# Altium PCB SW 12.PcbDoc
Units mil, origin at the board's own origin, x right, y up, seen from the top; angles counter-clockwise.
Board outline 1183 x 1280 mil, 2 copper layers (Top Layer, Bottom Layer); 30 components, 16 nets, 78 pads, 28 vias.
Unrouted connection lines stored in the file: 1.
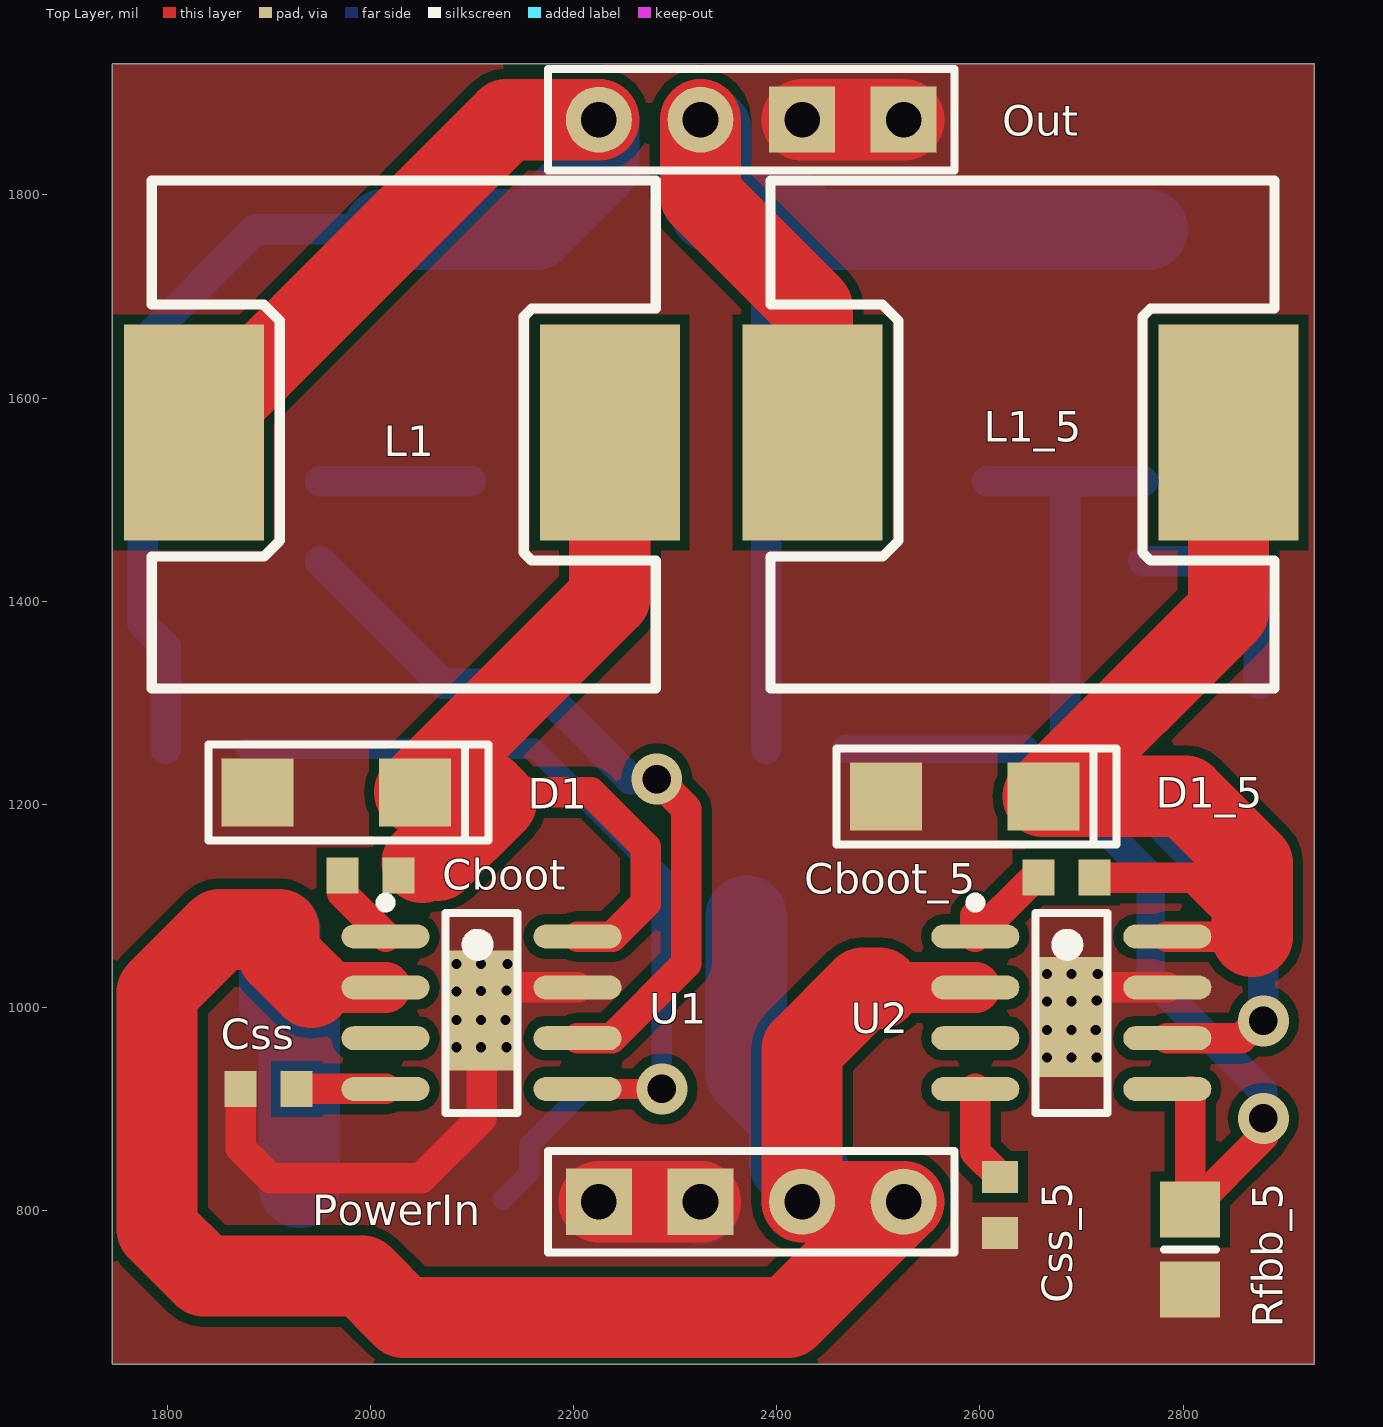
[diagram p0: Top Layer view]
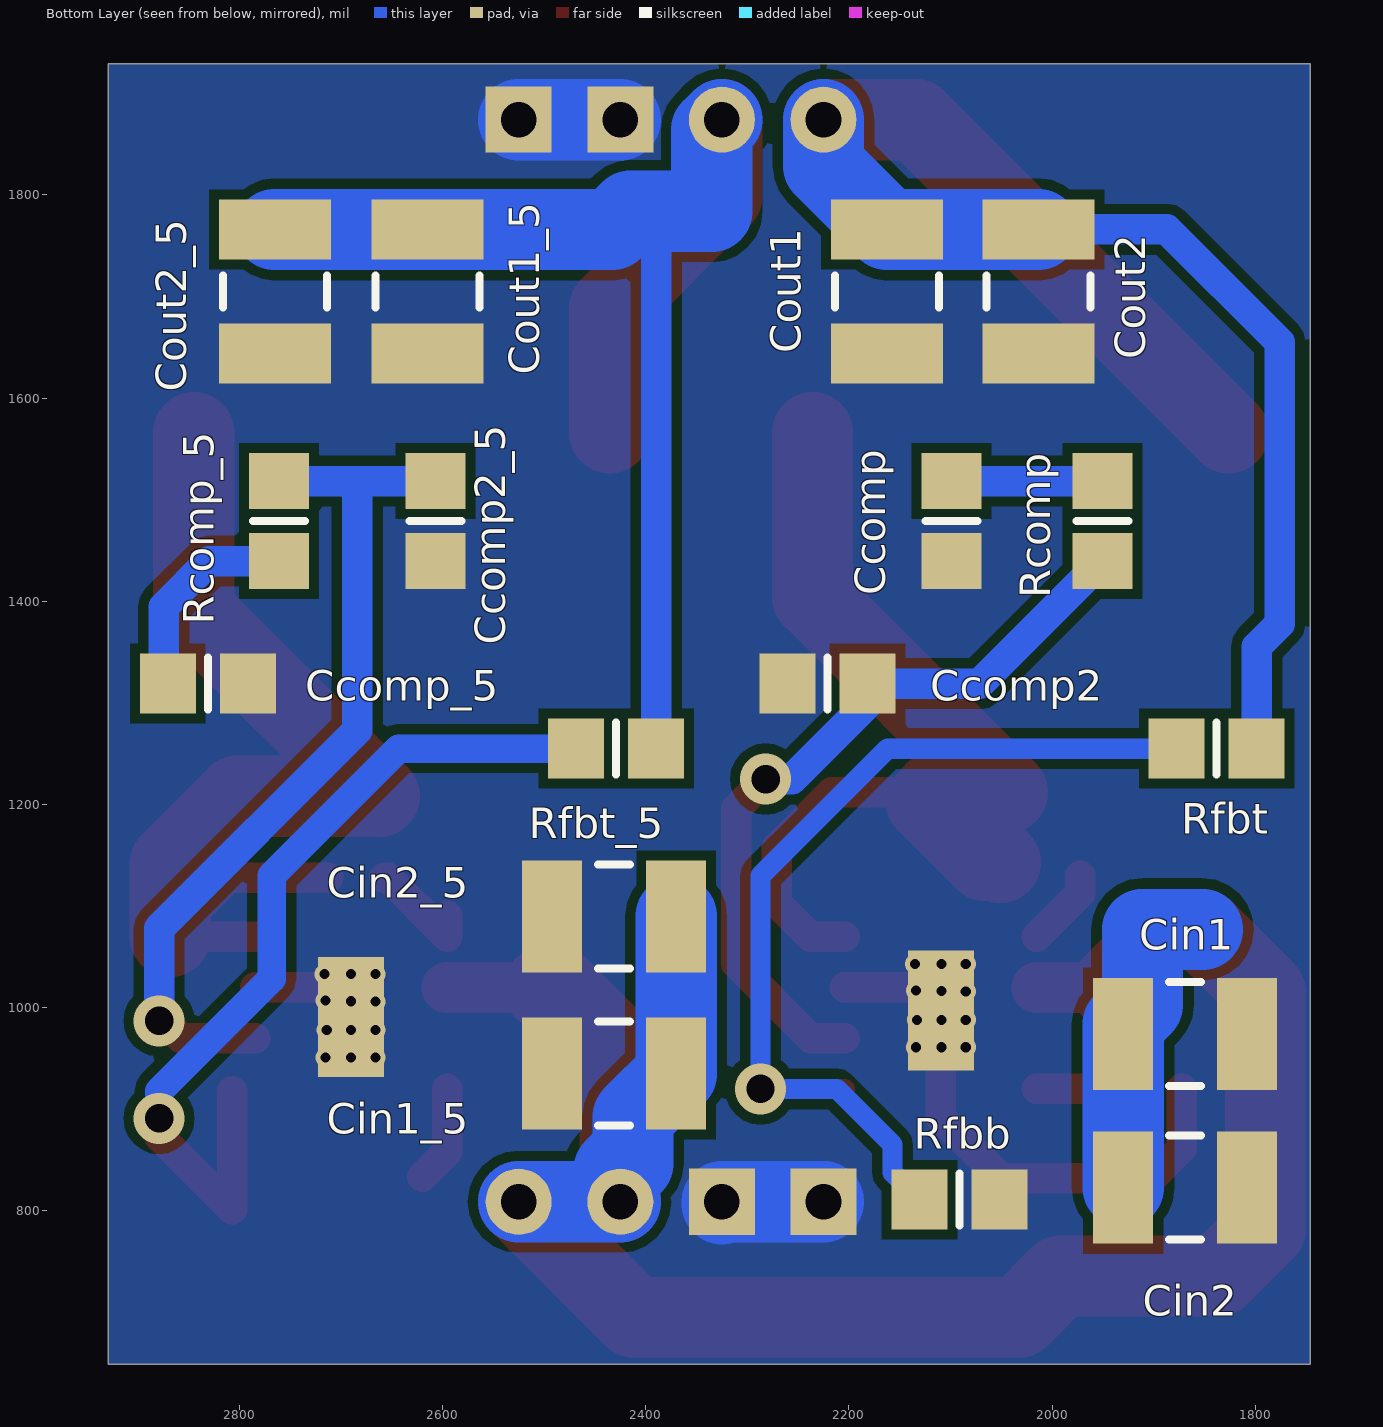
[diagram p1: Bottom Layer view, seen from below]

## Layer stack, top to bottom
Top Solder: solder mask 0.4, Solder Resist, Dk 3.5
Top Layer: signal copper 1.4
Dielectric 1: dielectric 12.6, FR-4, Dk 4.8
Bottom Layer: signal copper 1.4
Bottom Solder: solder mask 0.4, Solder Resist, Dk 3.5

## Board outline
1746,649 2929,649 2929,1929 1746,1929

## Design rules (kind name [scope] priority, off if disabled: settings)
Clearance [All] p1: gap=10
ComponentClearance [All] p1: gap=5 collisioncheckmode=3 verticalgap=5 showdistances=FALSE
PlaneConnect [All] p1: planeconnectstyle=Direct reliefexpansion=20 reliefentries=4 reliefconductorwidth=10 reliefairgap=10
PolygonConnect [All] p1: connectstyle=Direct reliefconductorwidth=10 reliefentries=4 polygonreliefangle="90 Angle" airgapwidth=10
RoomDefinition "Fuente 12V" [InComponentClass('Components Class 1')] p1: confinementstyle=ConfineIn formatcopy=TRUE lockcomponents=FALSE outline 2320,1880 1748.5,1880 1748.5,745 2320,745
RoutingVias [All] p1: holewidth=25 width=50 viastyle="Through Hole" minholewidth=10 minwidth=10 maxholewidth=28 maxwidth=50
SolderMaskExpansion [All] p1: expansion=4
Width [All] p1: maxlimit=80 minlimit=10 preferedwidth=20
28 further rules are at their usual default settings.

## Classes and differential pairs
component class "Components Class 1": Cboot Ccomp Ccomp2 Cin1 Cin2 Cout1 Cout2 Css D1 L1 Rcomp U1
component class SW_S_5: Cboot_5 Ccomp2_5 Ccomp_5 Cin1_5 Cin2_5 Cout1_5 Cout2_5 Css_5 D1_5 L1_5 Rcomp_5 Rfbb_5 Rfbt_5 U2
component class "SW 12": Out PowerIn
component class SW_S_12: Cboot Ccomp Ccomp2 Cin1 Cin2 Cout1 Cout2 Css D1 Iout L1 Rcomp Rfbb Rfbt U1 Vin

## Components (designator, comment, footprint, x,y, rotation, side; value= is the part's Value field where it differs from the comment)
Cboot "C1608X7R1E104K" 1608[0603] 2000,1130 r0 top
Cboot_5 "C1608X7R1E104K" 1608[0603] 2685,1128 r0 top
Ccomp "CC0805KRX7R9BB152" 6-0805_M 2099,1479 r270 bottom
Ccomp2 "CL21C300JBANNNC" 6-0805_M 2221,1319 r0 bottom
Ccomp2_5 "CL21C300JBANNNC" 6-0805_M 2607,1479 r270 bottom
Ccomp_5 "CC0805KRX7R9BB152" 6-0805_M 2831,1319 r180 bottom
Cin1 "GRM32ER71H475KA88L" C1210_M 1869,974 r180 bottom
Cin1_5 "GRM32ER71H475KA88L" C1210_M 2431,935 r0 bottom
Cin2 "GRM32ER71H475KA88L" C1210_M 1869,823 r180 bottom
Cin2_5 "GRM32ER71H475KA88L" C1210_M 2431,1090 r0 bottom
Cout1 "GRM32ER61E226KE15L" C1210_M 2162.5,1705 r270 bottom
Cout1_5 "GRM32ER61E226KE15L" C1210_M 2615,1705 r270 bottom
Cout2 "GRM32ER61E226KE15L" C1210_M 2013.5,1705 r270 bottom
Cout2_5 "GRM32ER61E226KE15L" C1210_M 2765,1705 r270 bottom
Css "GRM188R71E822KA01D" 1608[0603] 1900,920 r180 top
Css_5 "GRM188R71E822KA01D" 1608[0603] 2620,806 r270 top
D1 "B340A-13-F" "SMA Diode Package" 1966.5,1212 r180 top
D1_5 "B340A-13-F" "SMA Diode Package" 2585,1208 r180 top
L1 "SRR1260-150M" SRR1260 2033,1566 r180 top
L1_5 "SRR1260-150M" SRR1260 2642,1566 r180 top
Out "Header 4" HDR1X4 2225,1874 r0 top
PowerIn "Header 4" HDR1X4 2525,809 r180 top
Rcomp "CRCW080538K3FKEA" 6-0805_M 1950.5,1479 r90 bottom
Rcomp_5 "CRCW080538K3FKEA" 6-0805_M 2761,1479 r270 bottom
Rfbb "CRCW0805732RFKEA" 6-0805_M 2091,811 r180 bottom
Rfbb_5 "CRCW0805732RFKEA" 6-0805_M 2807,762 r270 top
Rfbt "CRCW080510K2FKEA" 6-0805_M 1838,1255 r0 bottom
Rfbt_5 "CRCW080510K2FKEA" 6-0805_M 2429,1255 r0 bottom
U1 "TPS54331DDAR" TI-D8_N 2109.5,995 r0 top
U2 "TPS54331DDAR" TI-D8_N 2690,995 r0 top

## Footprints (in the part's own frame and the unit in brackets; to place one, negate y for a bottom-side part, rotate by r counter-clockwise, add the part's x,y. Pads: shape width x height; smd on the part's side, far side on the other; paste and mask are expansions set on the pad)
6-0805_M [mm] "Chip Resistor, Body 2.0x1.2mm, IPC Low Density"
  rect 1.4x1.5 smd: 1(-1,0) 2(1,0)
  silkscreen extent 0,-0.65 0,0.65, body extent -1.07,-0.7 1.07,0.7, height 0.7
1608[0603] [mm] "Chip Capacitor, Body 1.6x0.8mm, IPC High Density"
  rect 0.8x0.9 smd: 1(-0.7,0) 2(0.7,0)
  body extent -0.87,-0.48 0.87,0.48, height 1.3
C1210_M [mm] "Chip Capacitor, Body 3.2x2.5mm, IPC Low Density"
  rect 1.5x2.8 smd: 1(-1.55,0) 2(1.55,0)
  silkscreen extent -0.4,-1.3 0.4,1.3, body extent -1.7,-1.35 1.7,1.35, height 1.5
HDR1X4 [mil] "Connector; Header; 4 Position"
  round 65 hole 35: 1(0,0) 2(100,0)
  rect 65x65 hole 35: 3(200,0) 4(300,0)
  silkscreen extent -50,-50 350,50
"SMA Diode Package" [mm]
  rect 1.8x1.7 smd: 1(-1.965,0) 2(1.965,0)
  silkscreen extent -3.8,-1.2 3.2,1.2, body extent -2.6,-1.2 2.6,1.2, height 2.44
SRR1260 [mm]
  rect 3.5x5.4 smd paste+0: 1(-5.15,0)
  rect 3.5x5.4 smd: 2(5.25,0)
  silkscreen extent -6.3,-6.3 6.3,6.4, body extent -6.3,-6.3 6.3,6.4, height 6.15
TI-D8_N [mm] "SOIC, 8-Leads, Body 4.9x3.9mm, Pitch 1.27mm, IPC Medium Density"
  oval 2.2x0.6 smd: 1(-2.4,1.905) 2(-2.4,0.635) 3(-2.4,-0.635) 4(-2.4,-1.905) 5(2.4,-1.905) 6(2.4,-0.635) 7(2.4,0.635) 8(2.4,1.905)
  silkscreen extent -2.52,-2.5 0.9,2.88, body extent -2,-2.5 2,2.5, height 1.75

## Part data
Ccomp Ccomp_5: "CC0805KRX7R9BB15"
Cin1 Cin1_5 Cin2 Cin2_5: "GRM32ER71H475KA8"
Cout1 Cout1_5 Cout2 Cout2_5: "GRM32ER61E226KE1"
Css Css_5: "GRM188R71E822KA0"
Out PowerIn: "Header, 4-Pin"

## Free pads (board coordinates)
  rect 65x118.11 all layers, no hole: ""(2109.5,997) ""(2690,991)

## Via types
v1: diameter 20, hole 10, Top Layer to Bottom Layer, 24 vias
v2: diameter 50, hole 28, Top Layer to Bottom Layer, 4 vias

## Nets (pads, with @x,y where several pads share a name; then routed paths per layer and width w, separated by ;. In a path a pad name is that pad's centre, name@x,y a point inside that pad or via, vN(x,y) a via of type N, cw(c..) or ccw(c..) an arc to the next point about the centre after c; other vN are vias at no path point)
+5V: Cout1_5.1 Cout2_5.1 L1_5.2 Out.2 Rfbt_5.1 | length 1414.3
  Top Layer w80: Out.2 2325,1799 2435.31,1688.69 L1_5.2
  Bottom Layer w30: Rfbt_5.1 2389.63,1784
  Bottom Layer w80: Out.2 2335,1864 2335,1784 2389.63,1784 2415,1784 2432.98,1766.02 Cout1_5.1 Cout2_5.1
+12V: Cout1.1 Cout2.1 L1.2 Out.1 Rfbt.1 | length 1502
  Top Layer w80: L1.2 2134.31,1874 Out.1
  Bottom Layer w30: Rfbt.1 1798.63,1355.37 1776,1378 1776,1655 1887.02,1766.02 Cout2.1
  Bottom Layer w80: Cout2.1 Cout1.1 2225,1828.52 Out.1
GND: Ccomp2.2 Ccomp2_5.2 Ccomp.2 Ccomp_5.2 Cin1.2 Cin1_5.2 Cin2.2 Cin2_5.2 Cout1.2 Cout1_5.2 Cout2.2 Cout2_5.2 Css.2 Css_5.2 D1.2 D1_5.2 Out.3 Out.4 pad. PowerIn.3 PowerIn.4 Rfbb.2 Rfbb_5.2 U1.7 U2.7 | length 999.2
  Top Layer w30: Css.2 1872.44,861.56 1902,832 2050,832 2109.5,891.5 2109.5,997 pad.@2109.5,1015.33 ; pad.@2132.5,1020 U1.7 ; pad.@2716,1020 U2.7
  Top Layer w80: PowerIn.4 PowerIn.3 ; Out.3 Out.4
  Bottom Layer w80: PowerIn.4 2322.88,809 2325,806.88 PowerIn.3 ; Out.3 Out.4
  other v1: 2666,951 2690,951 2715,951 2085,961 2109,961 2134,961 2666,978 2690,978 2714,978 2085,988 2109,988 2133,988 2666,1006 2690,1006.33 2715,1007 2085,1016 2109,1016.33 2134,1017 2666,1033 2690,1033 2716,1033 2085,1043 2109,1043 2135,1043
NetCboot_1: Cboot.1 U1.1 | length 77.6
  Top Layer w30: Cboot.1 1972.44,1112.57 U1.1
NetCboot_5_1: Cboot_5.1 U2.1 | length 106.5
  Top Layer w30: 2595.51,1090.51 U2.1 2653.51,1128 Cboot_5.1
NetCcomp2_1: Ccomp2.1 Rcomp.1 U1.6 | length 762.9
  Top Layer w30: U1.6 2237.54,970 2311,1043.46 2311,1196 v2(2282,1225)
  Bottom Layer w30: Rcomp.1 2071.13,1319 Ccomp2.1 2181.63,1299.37 2256,1225 v2(2282,1225)
NetCcomp2_5_1: Ccomp2_5.1 Rcomp_5.1 U2.6 | length 878.9
  Top Layer w30: U2.6 2857,970 2879,992 v2(2879,987)
  Bottom Layer w30: Ccomp2_5.1 2694,1518.37 ; Rcomp_5.1 2694,1518.37 ; v2(2879,987) 2879,1078 2684,1273 2684,1508.37 2694,1518.37
NetCcomp_1: Ccomp.1 Rcomp.2 | length 148.5
  Bottom Layer w30: Rcomp.2 Ccomp.1
NetCcomp_5_1: Ccomp_5.1 Rcomp_5.2 | length 207.6
  Bottom Layer w30: Rcomp_5.2 2829.37,1439.63 2874.37,1394.63 Ccomp_5.1@2874.37,1319
NetCss_1: Css.1 U1.4 | length 87.5
  Top Layer w30: Css.1 U1.4
NetCss_5_1: Css_5.1 U2.4 | length 96.6
  Top Layer w30: U2.4 2595.51,858.05 Css_5.1
NetRfbb_1: Rfbb.1 Rfbt.2 U1.5 | length 972.2
  Top Layer w20: U1.5 v2(2287,920)
  Bottom Layer w20: Rfbt.2 2162,1255 2287,1130 v2(2287,920) 2212,920 2157,865 2157,837.63 Rfbb.1
NetRfbb_5_1: Rfbb_5.1 Rfbt_5.2 U2.5 | length 872.5
  Top Layer w28: v2@2879,881 v2(2879,891)
  Top Layer w30: U2.5@2807,918 Rfbb_5.1 2879,873.37 v2@2879,881
  Bottom Layer w28: Rfbt_5.2 2643,1255 2768,1130 2768,1028.7 2879,917.7 v2(2879,891)
PH_5: Cboot_5.2 D1_5.1 L1_5.1 U2.8 | length 1001.5
  Top Layer w30: Cboot_5.2 2810,1128 2868,1070 U2.8
  Top Layer w80: L1_5.1 2844.76,1390.39 D1_5.1 2802,1208 2868,1142 2868,1070
PH_12: Cboot.2 D1.1 L1.1 U1.8 | length 929.3
  Top Layer w30: D1.1 2115,1212 2217,1212 2271,1158 2271,1103 2238,1070 U1.8
  Top Layer w80: D1.1 2235.76,1403.89 L1.1 ; 2051,1143 2053,1145 2066,1145 2124,1203 2115,1212
VIN: Cin1.1 Cin1_5.1 Cin2.1 Cin2_5.1 PowerIn.1 PowerIn.2 U1.2 U2.2 | length 2502.6
  Top Layer w50: 1942,1020 U1.2 ; 2486,1020 U2.2
  Top Layer w80: 1942,1020 1910,1052 1910,1077 1852,1077 1790,1015 1790,782.27 1836.27,736 1992,736 2033,695 2411,695 PowerIn.1 PowerIn.2 2425,959 2485,1019 2501,1019
  Bottom Layer w80: 1852,1077 1910,1077 ; 1911,1077 1911,1003.02 1930.02,984 Cin1.1 Cin2.1 ; Cin2_5.1 Cin1_5.1 2412.5,892.48 2412.5,846.67 2425,846.67 PowerIn.2@2431.25,840.42 ; PowerIn.2 PowerIn.1
pads on no net: U1.3 U2.3

## Polygon pours and split planes (outlines as drawn)
GND on Top Layer "gnd mask" (solid, pour order 6): 1746,1929 2929,1929 2929,649 1746,649
GND on Bottom Layer "gnd mask" (solid, pour order 8): 1746,1929 1746,649 2929,649 2929,1929